# Altium PCB PCB.PcbDoc
Units mm, origin at the board's own origin, x right, y up, seen from the top; angles counter-clockwise.
Board outline 152.4 x 101.6 mm, 2 copper layers (Top Layer, Bottom Layer); 10 components, 10 nets, 374 pads, 1 vias.
Unrouted connection lines stored in the file: 17.
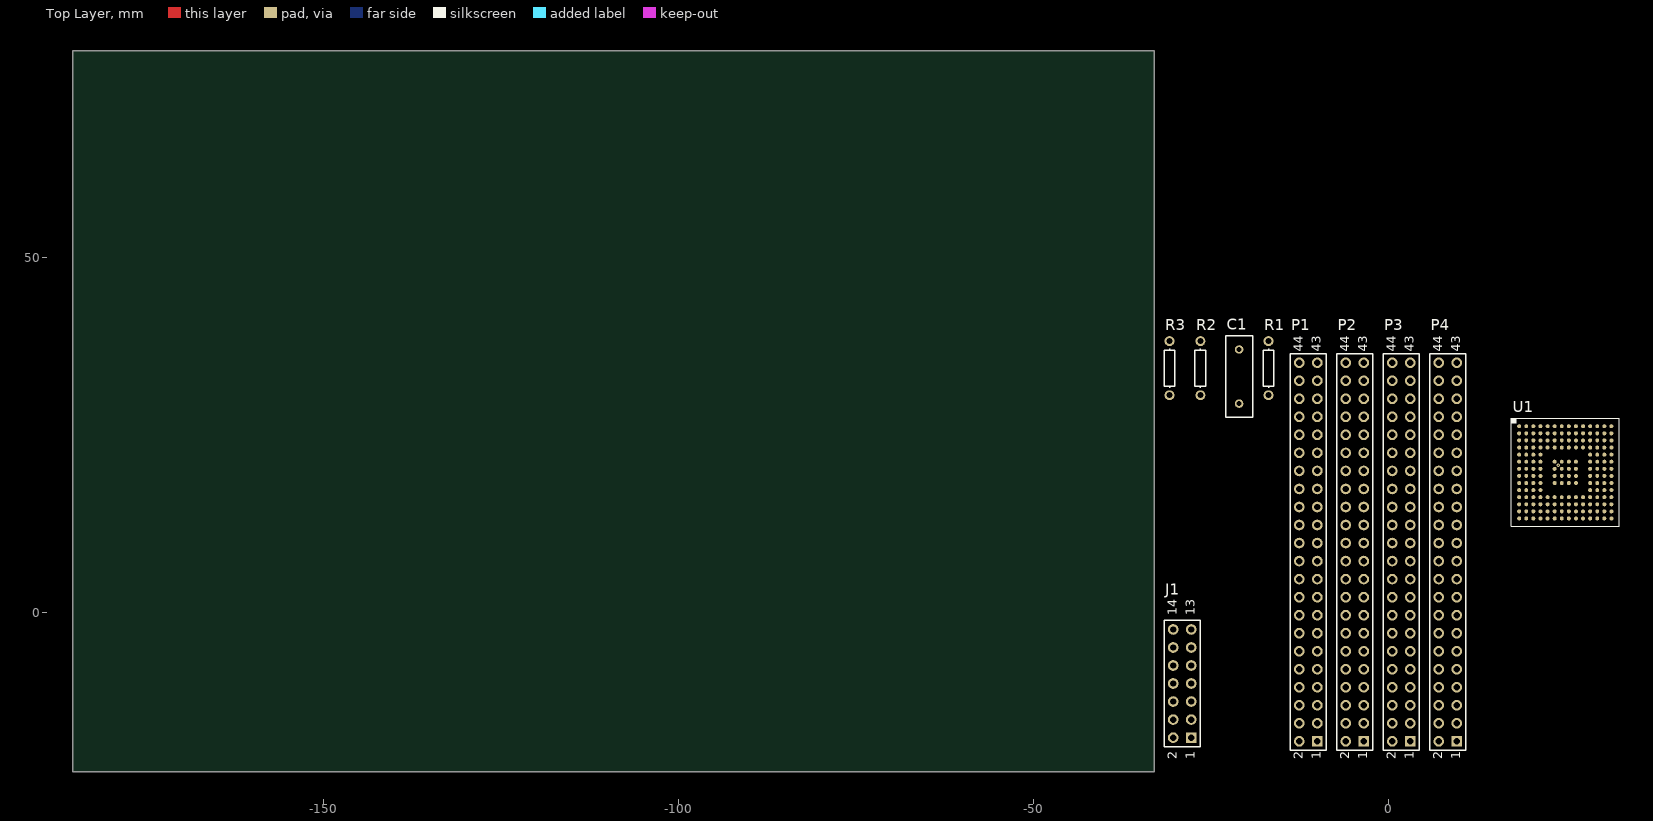
[diagram p0: Top Layer view]
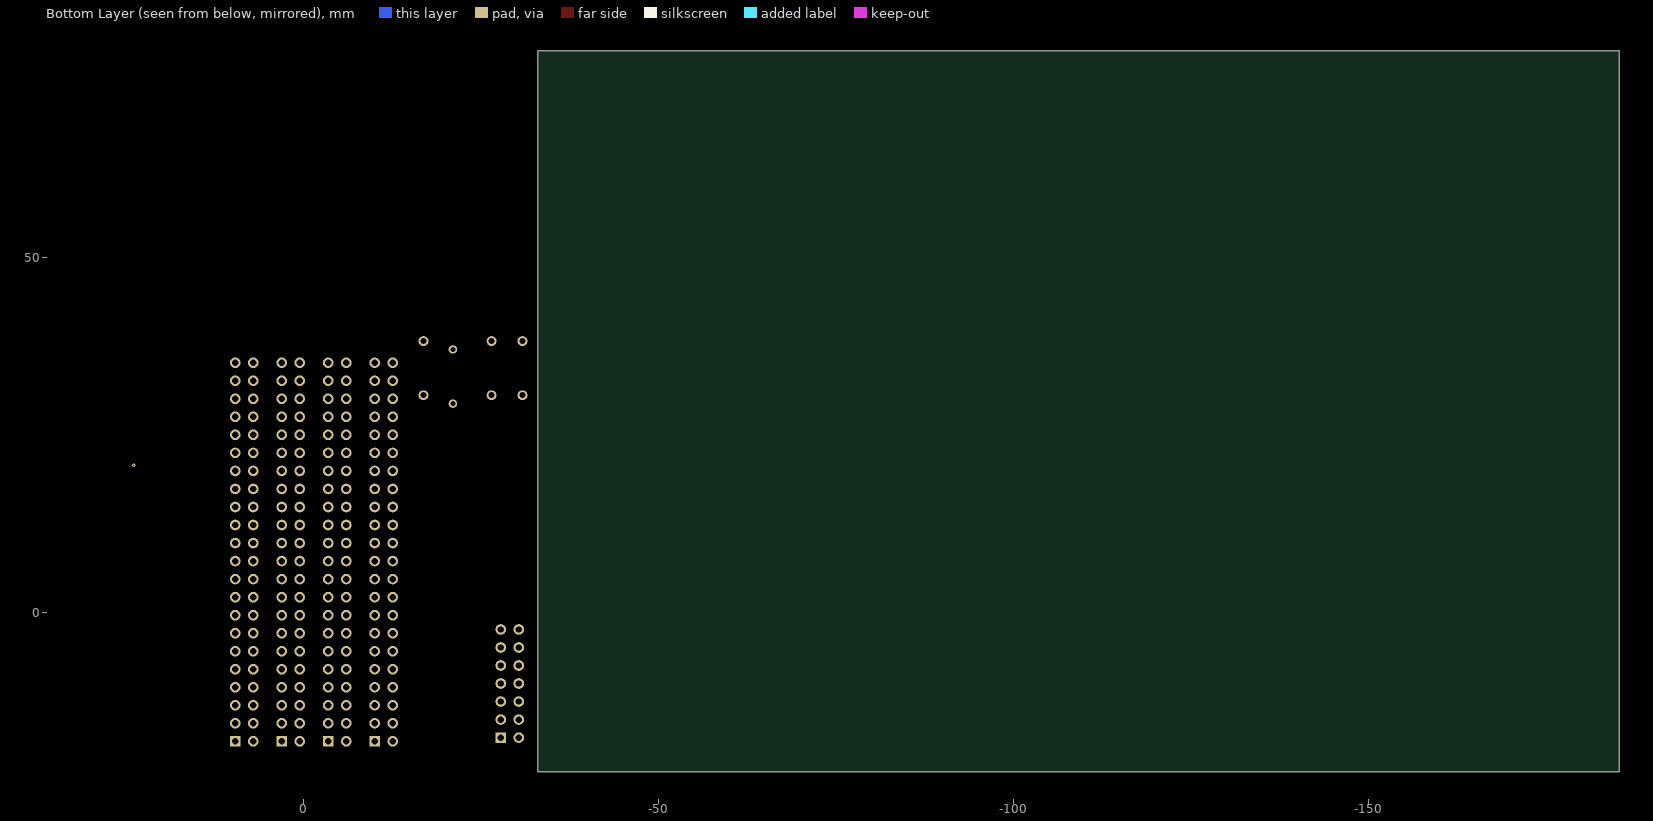
[diagram p1: Bottom Layer view, seen from below]

## Layer stack, top to bottom
Top Solder: solder mask 0.0102, Solder Resist, Dk 3.5
Top Layer: signal copper 0.0356
Dielectric 1: dielectric 0.32, FR-4, Dk 4.8
Bottom Layer: signal copper 0.0356
Bottom Solder: solder mask 0.0102, Solder Resist, Dk 3.5

## Board outline
-185.325,-22.475 -32.925,-22.475 -32.925,79.125 -185.325,79.125

## Design rules (kind name [scope] priority, off if disabled: settings)
Clearance [All] p1: gap=0.254 ignorepadtopadclearanceinfootprint=FALSE except(0: Arc-Hole Track-Hole SMDPad-Hole THPad-Hole Via-Hole Fill-Hole Poly-Hole Region-Hole Text-Hole)
PolygonConnect [All] p1: connectstyle=Relief reliefconductorwidth=0.254 reliefentries=4 polygonreliefangle="90 Angle" airgapwidth=0.254
RoutingVias [All] p1: holewidth=0.3 width=0.5 viastyle="Through Hole" minholewidth=0.2 minwidth=0.3 maxholewidth=0.5 maxwidth=1.27
SolderMaskExpansion [All] p1: expansion=0.102
Width [All] p1: maxlimit=0.254 minlimit=0.254 preferedwidth=0.254
30 further rules are at their usual default settings.

## Classes and differential pairs
component class DSP_Header: C1 J1 P1 P2 P3 P4 R1 R2 R3
component class DSP_Power&Analog: U1

## Components (designator, comment, footprint, x,y, rotation, side; value= is the part's Value field where it differs from the comment)
C1 "Cap" RAD-0.3 -20.991,33.229 r90 top value=100nF
J1 "JTAG" HDR2X7 -27.741,-17.649 r90 top
P1 "Header 22X2" HDR2X22 -9.965,-18.174 r90 top
P2 "Header 22X2" HDR2X22 -3.415,-18.174 r90 top
P3 "Header 22X2" HDR2X22 3.135,-18.174 r90 top
P4 "Header 22X2" HDR2X22 9.686,-18.174 r90 top
R1 "Res1" AXIAL-0.3 -16.841,34.404 r90 top value=2.2K
R2 "Res1" AXIAL-0.3 -26.441,34.404 r90 top value=4.7K
R3 "Res1" AXIAL-0.3 -30.791,34.404 r90 top value=4.7K
U1 "TMS320F28335_ZJZ" ZJZ176 24.975,19.725 r0 top value=Value

## Footprints (in the part's own frame and the unit in brackets; to place one, negate y for a bottom-side part, rotate by r counter-clockwise, add the part's x,y. Pads: shape width x height; smd on the part's side, far side on the other; paste and mask are expansions set on the pad)
AXIAL-0.3 [mm] "Axial Device, Thru-Hole; 2 Leads; 0.3 in Pin Spacing"
  round 1.4 hole 0.85: 1(-3.81,0) 2(3.81,0)
  silkscreen extent -2.77,-0.76 2.77,0.76
HDR2X7 [mm] "Connector; Header; 7x2 Position"
  rect 1.5x1.5 hole 0.9: 1(0,0)
  round 1.5 hole 0.9: 2(0,2.54) 3(2.54,0) 4(2.54,2.54) 5(5.08,0) 6(5.08,2.54) 7(7.62,0) 8(7.62,2.54) 9(10.16,0) 10(10.16,2.54) 11(12.7,0) 12(12.7,2.54) 13(15.24,0) 14(15.24,2.54)
  silkscreen extent -1.27,-1.27 16.51,3.81
HDR2X22 [mm] "Connector; Header; 22x2 Position"
  rect 1.5x1.5 hole 0.9: 1(0,0)
  round 1.5 hole 0.9: 2(0,2.54) 3(2.54,0) 4(2.54,2.54) 5(5.08,0) 6(5.08,2.54) 7(7.62,0) 8(7.62,2.54) 9(10.16,0) 10(10.16,2.54) 11(12.7,0) 12(12.7,2.54) 13(15.24,0) 14(15.24,2.54) 15(17.78,0) 16(17.78,2.54) 17(20.32,0) 18(20.32,2.54) 19(22.86,0) 20(22.86,2.54) 21(25.4,0) 22(25.4,2.54) 23(27.94,0) 24(27.94,2.54) 25(30.48,0) 26(30.48,2.54) 27(33.02,0) 28(33.02,2.54) 29(35.56,0) 30(35.56,2.54) 31(38.1,0) 32(38.1,2.54) 33(40.64,0) 34(40.64,2.54) 35(43.18,0) 36(43.18,2.54) 37(45.72,0) 38(45.72,2.54) 39(48.26,0) 40(48.26,2.54) 41(50.8,0) 42(50.8,2.54) 43(53.34,0) 44(53.34,2.54)
  silkscreen extent -1.27,-1.27 54.61,3.81
RAD-0.3 [mm] "Radial Cap, Thru-Hole; 2 Leads; 0.3 in Pin Spacing"
  round 1.2 hole 0.7: 1(-3.81,0) 2(3.81,0)
  silkscreen extent -5.71,-1.91 5.71,1.91
ZJZ176 [mm]
  round 0.559 smd: A1(-6.5,6.5) A2(-5.5,6.5) A3(-4.5,6.5) A4(-3.5,6.5) A5(-2.5,6.5) A6(-1.5,6.5) A7(-0.5,6.5) A8(0.5,6.5) A9(1.5,6.5) A10(2.5,6.5) A11(3.5,6.5) A12(4.5,6.5) A13(5.5,6.5) A14(6.5,6.5) B1(-6.5,5.5) B2(-5.5,5.5) B3(-4.5,5.5) B4(-3.5,5.5) B5(-2.5,5.5) B6(-1.5,5.5) B7(-0.5,5.5) B8(0.5,5.5) B9(1.5,5.5) B10(2.5,5.5) B11(3.5,5.5) B12(4.5,5.5) B13(5.5,5.5) B14(6.5,5.5) C1(-6.5,4.5) C2(-5.5,4.5) C3(-4.5,4.5) C4(-3.5,4.5) C5(-2.5,4.5) C6(-1.5,4.5) C7(-0.5,4.5) C8(0.5,4.5) C9(1.5,4.5) C10(2.5,4.5) C11(3.5,4.5) C12(4.5,4.5) C13(5.5,4.5) C14(6.5,4.5) D1(-6.5,3.5) D2(-5.5,3.5) D3(-4.5,3.5) D4(-3.5,3.5) D5(-2.5,3.5) D6(-1.5,3.5) D7(-0.5,3.5) D8(0.5,3.5) D9(1.5,3.5) D10(2.5,3.5) D11(3.5,3.5) D12(4.5,3.5) D13(5.5,3.5) D14(6.5,3.5) E1(-6.5,2.5) E2(-5.5,2.5) E3(-4.5,2.5) E4(-3.5,2.5) E11(3.5,2.5) E12(4.5,2.5) E13(5.5,2.5) E14(6.5,2.5) F1(-6.5,1.5) F2(-5.5,1.5) F3(-4.5,1.5) F4(-3.5,1.5) F6(-1.5,1.5) F7(-0.5,1.5) F8(0.5,1.5) F9(1.5,1.5) F11(3.5,1.5) F12(4.5,1.5) F13(5.5,1.5) F14(6.5,1.5) G1(-6.5,0.5) G2(-5.5,0.5) G3(-4.5,0.5) G4(-3.5,0.5) G6(-1.5,0.5) G7(-0.5,0.5) G8(0.5,0.5) G9(1.5,0.5) G11(3.5,0.5) G12(4.5,0.5) G13(5.5,0.5) G14(6.5,0.5) H1(-6.5,-0.5) H2(-5.5,-0.5) H3(-4.5,-0.5) H4(-3.5,-0.5) H6(-1.5,-0.5) H7(-0.5,-0.5) H8(0.5,-0.5) H9(1.5,-0.5) H11(3.5,-0.5) H12(4.5,-0.5) H13(5.5,-0.5) H14(6.5,-0.5) J1(-6.5,-1.5) J2(-5.5,-1.5) J3(-4.5,-1.5) J4(-3.5,-1.5) J6(-1.5,-1.5) J7(-0.5,-1.5) J8(0.5,-1.5) J9(1.5,-1.5) J11(3.5,-1.5) J12(4.5,-1.5) J13(5.5,-1.5) J14(6.5,-1.5) K1(-6.5,-2.5) K2(-5.5,-2.5) K3(-4.5,-2.5) K4(-3.5,-2.5) K11(3.5,-2.5) K12(4.5,-2.5) K13(5.5,-2.5) K14(6.5,-2.5) L1(-6.5,-3.5) L2(-5.5,-3.5) L3(-4.5,-3.5) L4(-3.5,-3.5) L5(-2.5,-3.5) L6(-1.5,-3.5) L7(-0.5,-3.5) L8(0.5,-3.5) L9(1.5,-3.5) L10(2.5,-3.5) L11(3.5,-3.5) L12(4.5,-3.5) L13(5.5,-3.5) L14(6.5,-3.5) M1(-6.5,-4.5) M2(-5.5,-4.5) M3(-4.5,-4.5) M4(-3.5,-4.5) M5(-2.5,-4.5) M6(-1.5,-4.5) M7(-0.5,-4.5) M8(0.5,-4.5) M9(1.5,-4.5) M10(2.5,-4.5) M11(3.5,-4.5) M12(4.5,-4.5) M13(5.5,-4.5) M14(6.5,-4.5) N1(-6.5,-5.5) N2(-5.5,-5.5) N3(-4.5,-5.5) N4(-3.5,-5.5) N5(-2.5,-5.5) N6(-1.5,-5.5) N7(-0.5,-5.5) N8(0.5,-5.5) N9(1.5,-5.5) N10(2.5,-5.5) N11(3.5,-5.5) N12(4.5,-5.5) N13(5.5,-5.5) N14(6.5,-5.5) P1(-6.5,-6.5) P2(-5.5,-6.5) P3(-4.5,-6.5) P4(-3.5,-6.5) P5(-2.5,-6.5) P6(-1.5,-6.5) P7(-0.5,-6.5) P8(0.5,-6.5) P9(1.5,-6.5) P10(2.5,-6.5) P11(3.5,-6.5) P12(4.5,-6.5) P13(5.5,-6.5) P14(6.5,-6.5)
  silkscreen extent -7.59,-7.59 7.59,7.62, body extent -7.59,-7.59 7.59,7.59, height 2.06

## Part data
C1: "Capacitor", LatestRevisionDate=17-Jul-2002, LatestRevisionNote="Re-released for DXP Platform.", PackageDescription="Radial Cap, Thru-Hole; 2 Leads; 0.3 in Pin Spacing", PackageReference=RAD-0.3, Published=8-Jun-2000, Publisher="Altium Limited"
P1 P2 P3 P4: "Header, 22-Pin, Dual row", LatestRevisionDate=17-Jul-2002, LatestRevisionNote="Re-released for DXP Platform.", Publisher="Altium Limited"
R1 R2 R3: "Resistor", LatestRevisionDate=17-Jul-2002, LatestRevisionNote="Re-released for DXP Platform.", PackageDescription="Axial Device, Thru-Hole; 2 Leads; 0.3 in Pin Spacing", PackageReference=AXIAL-0.3, Published=8-Jun-2000, Publisher="Altium Limited"
U1: "Imported", Manufacturer="Texas Instruments", Manufacturer_Part_Number=tms320f28335_zjz_176, PACKAGE_DESIGNATOR=ZJZ, Datasheet_URL=http://www.ti.com/lit/gpn/TMS320F28335, FAMILY_NAME="28X DELFINO&#153; FLOATING-POINT SERIES", GENERIC_PART_NUMBER=TMS320F28335, INDUSTRY_STD_PKG_TYPE=BGA, PIN_COUNT=176, RefDes=RefDes, Type=Type, Vendor="Texas Instuments"

## Via types
v1: diameter 0.508, hole 0.254, Top Layer to Bottom Layer, 1 vias

## Nets (pads, with @x,y where several pads share a name; then routed paths per layer and width w, separated by ;. In a path a pad name is that pad's centre, name@x,y a point inside that pad or via, vN(x,y) a via of type N, cw(c..) or ccw(c..) an arc to the next point about the centre after c; other vN are vias at no path point)
D3_3V: R2.2 R3.2
EMU0: U1.N7
EMU1: J1.14 R3.1 U1.P8
GND: C1.1 J1.4 J1.8 J1.10 J1.12 R1.1
NetJ1_13: J1.13 R2.1
TCK: J1.9 J1.11 U1.M14
TDI: J1.3 U1.N12
TDO: J1.7 U1.N13
TMS: J1.1 U1.M12
TRST: C1.2 J1.2 R1.2 U1.L11
pads on no net: J1.5 J1.6 P1.1 P1.2 P1.3 P1.4 P1.5 P1.6 P1.7 P1.8 P1.9 P1.10 P1.11 P1.12 P1.13 P1.14 P1.15 P1.16 P1.17 P1.18 P1.19 P1.20 P1.21 P1.22 P1.23 P1.24 P1.25 P1.26 P1.27 P1.28 P1.29 P1.30 P1.31 P1.32 P1.33 P1.34 P1.35 P1.36 P1.37 P1.38 P1.39 P1.40 P1.41 P1.42 P1.43 P1.44 P2.1 P2.2 P2.3 P2.4 P2.5 P2.6 P2.7 P2.8 P2.9 P2.10 P2.11 P2.12 P2.13 P2.14 P2.15 P2.16 P2.17 P2.18 P2.19 P2.20 P2.21 P2.22 P2.23 P2.24 P2.25 P2.26 P2.27 P2.28 P2.29 P2.30 P2.31 P2.32 P2.33 P2.34 P2.35 P2.36 P2.37 P2.38 P2.39 P2.40 P2.41 P2.42 P2.43 P2.44 P3.1 P3.2 P3.3 P3.4 P3.5 P3.6 P3.7 P3.8 P3.9 P3.10 P3.11 P3.12 P3.13 P3.14 P3.15 P3.16 P3.17 P3.18 P3.19 P3.20 P3.21 P3.22 P3.23 P3.24 P3.25 P3.26 P3.27 P3.28 P3.29 P3.30 P3.31 P3.32 P3.33 P3.34 P3.35 P3.36 P3.37 P3.38 P3.39 P3.40 P3.41 P3.42 P3.43 P3.44 P4.1 P4.2 P4.3 P4.4 P4.5 P4.6 P4.7 P4.8 P4.9 P4.10 P4.11 P4.12 P4.13 P4.14 P4.15 P4.16 P4.17 P4.18 P4.19 P4.20 P4.21 P4.22 P4.23 P4.24 P4.25 P4.26 P4.27 P4.28 P4.29 P4.30 P4.31 P4.32 P4.33 P4.34 P4.35 P4.36 P4.37 P4.38 P4.39 P4.40 P4.41 P4.42 P4.43 P4.44 U1.A1 U1.A2 U1.A3 U1.A4 U1.A5 U1.A6 U1.A7 U1.A8 U1.A9 U1.A10 U1.A11 U1.A12 U1.A13 U1.A14 U1.B1 U1.B2 U1.B3 U1.B4 U1.B5 U1.B6 U1.B7 U1.B8 U1.B9 U1.B10 U1.B11 U1.B12 U1.B13 U1.B14 U1.C1 U1.C2 U1.C3 U1.C4 U1.C5 U1.C6 U1.C7 U1.C8 U1.C9 U1.C10 U1.C11 U1.C12 U1.C13 U1.C14 U1.D1 U1.D2 U1.D3 U1.D4 U1.D5 U1.D6 U1.D7 U1.D8 U1.D9 U1.D10 U1.D11 U1.D12 U1.D13 U1.D14 U1.E1 U1.E2 U1.E3 U1.E4 U1.E11 U1.E12 U1.E13 U1.E14 U1.F1 U1.F2 U1.F3 U1.F4 U1.F6 U1.F7 U1.F8 U1.F9 U1.F11 U1.F12 U1.F13 U1.F14 U1.G1 U1.G2 U1.G3 U1.G4 U1.G6 U1.G7 U1.G8 U1.G9 U1.G11 U1.G12 U1.G13 U1.G14 U1.H1 U1.H2 U1.H3 U1.H4 U1.H6 U1.H7 U1.H8 U1.H9 U1.H11 U1.H12 U1.H13 U1.H14 U1.J1 U1.J2 U1.J3 U1.J4 U1.J6 U1.J7 U1.J8 U1.J9 U1.J11 U1.J12 U1.J13 U1.J14 U1.K1 U1.K2 U1.K3 U1.K4 U1.K11 U1.K12 U1.K13 U1.K14 U1.L1 U1.L2 U1.L3 U1.L4 U1.L5 U1.L6 U1.L7 U1.L8 U1.L9 U1.L10 U1.L12 U1.L13 U1.L14 U1.M1 U1.M2 U1.M3 U1.M4 U1.M5 U1.M6 U1.M7 U1.M8 U1.M9 U1.M10 U1.M11 U1.M13 U1.N1 U1.N2 U1.N3 U1.N4 U1.N5 U1.N6 U1.N8 U1.N9 U1.N10 U1.N11 U1.N14 U1.P1 U1.P2 U1.P3 U1.P4 U1.P5 U1.P6 U1.P7 U1.P9 U1.P10 U1.P11 U1.P12 U1.P13 U1.P14
copper on no net:
  other v1: 23.975,20.725

## Text inside footprints (layer, text, board x,y; h text height)
J1: Top Overlay "2" at -29.773,-20.697 h1.27 r90; Top Overlay "1" at -27.233,-20.697 h1.27 r90; Top Overlay "14" at -29.773,-0.377 h1.27 r90; Top Overlay "13" at -27.233,-0.377 h1.27 r90
P1: Top Overlay "2" at -11.997,-20.714 h1.27 r90; Top Overlay "1" at -9.457,-20.714 h1.27 r90; Top Overlay "44" at -11.997,36.69 h1.27 r90; Top Overlay "43" at -9.457,36.69 h1.27 r90
P2: Top Overlay "2" at -5.447,-20.714 h1.27 r90; Top Overlay "1" at -2.907,-20.714 h1.27 r90; Top Overlay "44" at -5.447,36.69 h1.27 r90; Top Overlay "43" at -2.907,36.69 h1.27 r90
P3: Top Overlay "2" at 1.103,-20.714 h1.27 r90; Top Overlay "1" at 3.643,-20.714 h1.27 r90; Top Overlay "44" at 1.103,36.69 h1.27 r90; Top Overlay "43" at 3.643,36.69 h1.27 r90
P4: Top Overlay "2" at 7.654,-20.714 h1.27 r90; Top Overlay "1" at 10.194,-20.714 h1.27 r90; Top Overlay "44" at 7.654,36.69 h1.27 r90; Top Overlay "43" at 10.194,36.69 h1.27 r90